# Altium PCB NRF52832_MODULE_V1.0_D.PcbDoc
Units mil, origin at the board's own origin, x right, y up, seen from the top; angles counter-clockwise.
Board outline 1129.92 x 688.98 mil, 2 copper layers (Top Layer, Bottom Layer); 74 components, 51 nets, 155 pads, 110 vias.
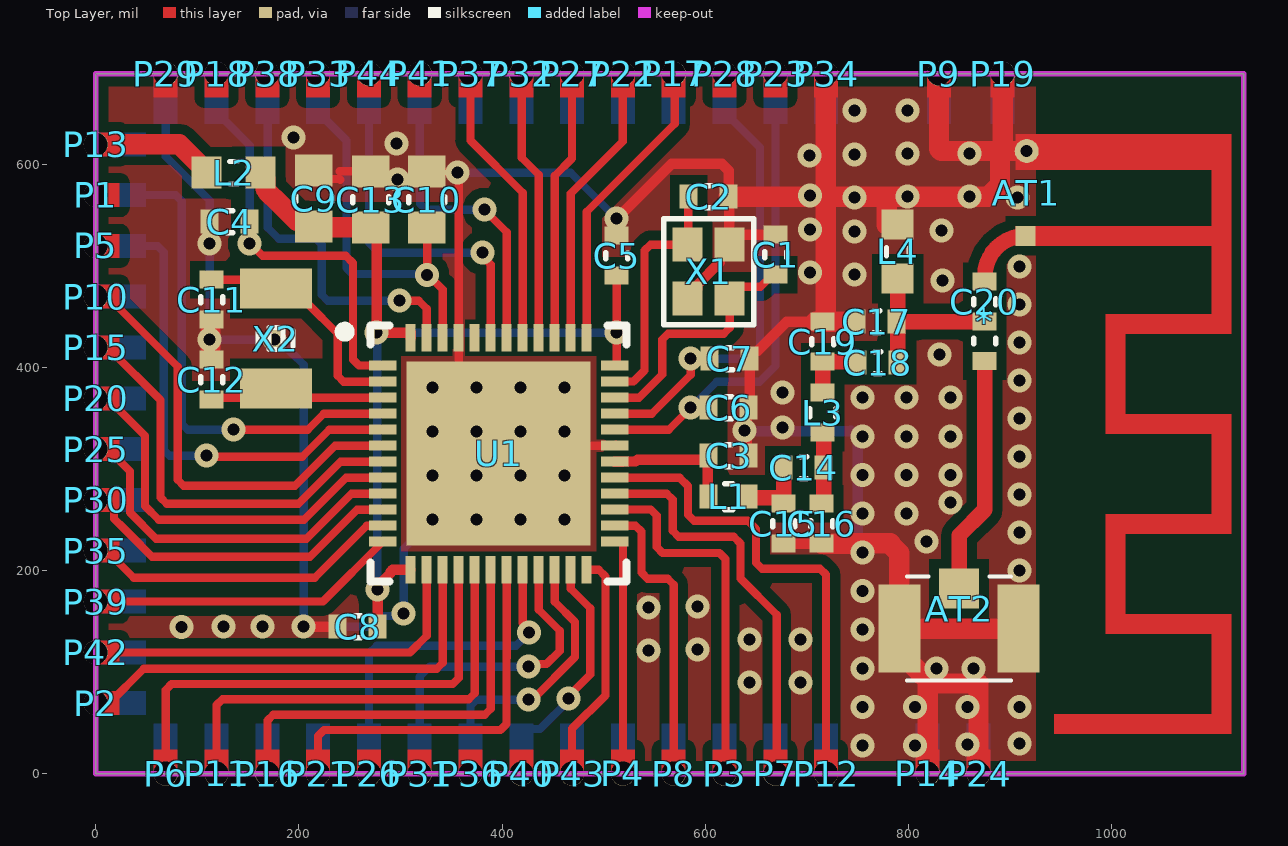
[diagram p0: Top Layer view]
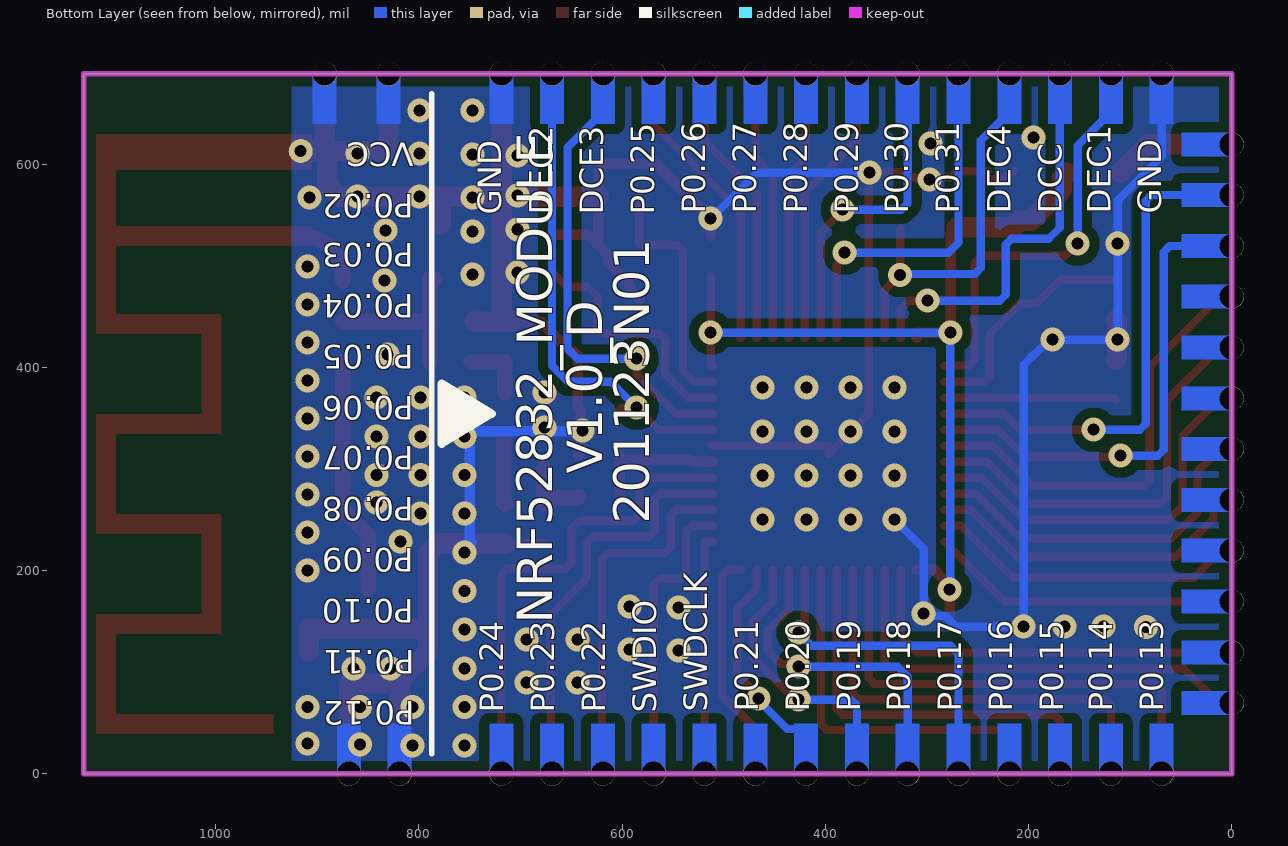
[diagram p1: Bottom Layer view, seen from below]

## Layer stack, top to bottom
Top Solder: solder mask 0.4, Solder Resist, Dk 3.5
Top Layer: signal copper 1.4
Dielectric 1: dielectric 12.6, FR-4, Dk 4.8
Bottom Layer: signal copper 1.4
Bottom Solder: solder mask 0.4, Solder Resist, Dk 3.5

## Board outline
0,0 0,688.98 1129.92,688.98 1129.92,0

## Design rules (kind name [scope] priority, off if disabled: settings)
Clearance NRF52832 [InComponent('U1')] p1: gap=5 ignorepadtopadclearanceinfootprint=FALSE
Clearance POLYGON [InPolygon] p2: gap=10 ignorepadtopadclearanceinfootprint=FALSE except(0: Arc-Hole Track-Hole SMDPad-Hole THPad-Hole Via-Hole Fill-Hole Poly-Hole Region-Hole Text-Hole)
Clearance [All] p3: gap=5 ignorepadtopadclearanceinfootprint=TRUE
HoleSize [All] p1: absolutevalues=TRUE maxlimit=31.5 minlimit=1 maxpercent=80.000 minpercent=20.000
MinimumSolderMaskSliver [All] p1: minsoldermaskwidth=0
PolygonConnect [All] p1: connectstyle=Direct reliefconductorwidth=10 reliefentries=4 polygonreliefangle="90 Angle" airgapwidth=10
RoutingVias [All] p1: holewidth=11.81 width=23.62 viastyle="Through Hole" minholewidth=11.81 minwidth=23.62 maxholewidth=28 maxwidth=50
SilkToSilkClearance [All] p1: silktosilkclearance=0
SolderMaskExpansion [All] p1: expansion=4 istentingtop=FALSE
Width RF [InNetClass('RF')] p1: maxlimit=15.29 minlimit=10 preferedwidth=15.29 impedanceprofiledriven=TRUE impedanceprofileid={D4BE34BD-DFD2-49A3-B558-EFD00441999C} impedanceprofilevalue=50.000000 minimp=50.000000 maximp=50.000000 favimp=50.000000
Width [All] p2: maxlimit=20 minlimit=5 preferedwidth=8
27 further rules are at their usual default settings.

## Classes and differential pairs
net class RF: Net*_1 Net*_2 Net*_3 NetC3_2 NetC14_1 NetC14_2 NetC18_1

## Components (designator, comment, footprint, x,y, rotation, side; value= is the part's Value field where it differs from the comment)
* "SELECT_0402" "PAD 0402_SELECT" 875,444.88 r270 top
AT1 "ANTEN_PCB" ANTEN_PCB_15MM_L 914.96,529.47 r270 top
AT2 "IPX_KK23011-32-7H" IPEX_ANTENNA 849.72,162.4 r180 top
C1 "12pF_0402" "CAP 0402" 669.29,510.83 r270 top
C2 "12pF_0402" "CAP 0402" 603.35,567.91 r180 top
C3 "0.8pF_0402" "CAP 0402" 623.03,312.99 r180 top
C4 "100nF_0402" "CAP 0402" 131.89,543.31 r0 top
C5 "100nF_0402" "CAP 0402" 512.8,509.84 r270 top
C6 "100pF_0402" "CAP 0402" 623.03,360.24 r0 top
C7 "100pF_0402" "CAP 0402" 624.02,408.46 r0 top
C8 "100nF_0402" "CAP 0402" 257.87,144.68 r0 top
C9 "4.7uF_0603" "CAP 0603" 214.57,565.94 r270 top
C10 "1uF_0603" "CAP 0603" 325.79,564.96 r270 top
C11 "12pF_0603" "CAP 0402" 114.17,466.54 r270 top
C12 "12pF_0603" "CAP 0402" 114.17,387.8 r90 top
C13 "10uF_0603" "CAP 0603" 270.67,564.96 r270 top
C14 "0.8pF_0402" "CAP 0402" 696.85,301.18 r180 top
C15 "0.8pF_0402" "CAP 0402" 677.17,246.06 r90 top
C16 "0.8pF_0402" "CAP 0402" 714.57,246.06 r90 top
C17 "0.8pF_0402" "CAP 0402" 768.7,444.88 r0 top
C18 "0.8pF_0402" "CAP 0402" 769.68,404.53 r0 top
C19 "0.8pF_0402" "CAP 0402" 715.55,425.2 r270 top
C20 "0.8pF_0402" "CAP 0402" 875,464.57 r270 top
L1 "3.9nH_0402" "Inductor 0402" 623.03,272.64 r0 top
L2 "10uH_0603" "INDUCTOR 0603" 135.83,591.54 r0 top
L3 "3.9nH_0402" "Inductor 0402" 715.55,355.32 r90 top
L4 "100nH_0603_HL" "INDUCTOR 0603_HL" 789.37,513.78 r270 top
P1 "Half-hole 0.6mm" HALF-HOLE_0.6MM 0,569.49 r180 top
P2 "Half-hole 0.6mm" HALF-HOLE_0.6MM 0,69.49 r180 top
P3 "Half-hole 0.6mm" HALF-HOLE_0.6MM 618.9,0 r270 top
P4 "Half-hole 0.6mm" HALF-HOLE_0.6MM 518.9,0 r270 top
P5 "Half-hole 0.6mm" HALF-HOLE_0.6MM 0,519.49 r180 top
P6 "Half-hole 0.6mm" HALF-HOLE_0.6MM 68.9,0 r270 top
P7 "Half-hole 0.6mm" HALF-HOLE_0.6MM 668.9,0 r270 top
P8 "Half-hole 0.6mm" HALF-HOLE_0.6MM 568.9,0 r270 top
P9 "Half-hole 0.6mm" HALF-HOLE_0.6MM 829.92,688.98 r90 top
P10 "Half-hole 0.6mm" HALF-HOLE_0.6MM 0,469.49 r180 top
P11 "Half-hole 0.6mm" HALF-HOLE_0.6MM 118.9,0 r270 top
P12 "Half-hole 0.6mm" HALF-HOLE_0.6MM 718.9,0 r270 top
P13 "Half-hole 0.6mm" HALF-HOLE_0.6MM 0,619.49 r180 top
P14 "Half-hole 0.6mm" HALF-HOLE_0.6MM 818.9,0 r270 top
P15 "Half-hole 0.6mm" HALF-HOLE_0.6MM 0,419.49 r180 top
P16 "Half-hole 0.6mm" HALF-HOLE_0.6MM 168.9,0 r270 top
P17 "Half-hole 0.6mm" HALF-HOLE_0.6MM 568.9,688.98 r90 top
P18 "Half-hole 0.6mm" HALF-HOLE_0.6MM 118.9,688.98 r90 top
P19 "Half-hole 0.6mm" HALF-HOLE_0.6MM 892.72,688.98 r90 top
P20 "Half-hole 0.6mm" HALF-HOLE_0.6MM 0,369.49 r180 top
P21 "Half-hole 0.6mm" HALF-HOLE_0.6MM 218.9,0 r270 top
P22 "Half-hole 0.6mm" HALF-HOLE_0.6MM 518.9,688.98 r90 top
P23 "Half-hole 0.6mm" HALF-HOLE_0.6MM 668.9,688.98 r90 top
P24 "Half-hole 0.6mm" HALF-HOLE_0.6MM 868.9,0 r270 top
P25 "Half-hole 0.6mm" HALF-HOLE_0.6MM 0,319.49 r180 top
P26 "Half-hole 0.6mm" HALF-HOLE_0.6MM 268.9,0 r270 top
P27 "Half-hole 0.6mm" HALF-HOLE_0.6MM 468.9,688.98 r90 top
P28 "Half-hole 0.6mm" HALF-HOLE_0.6MM 618.9,688.98 r90 top
P29 "Half-hole 0.6mm" HALF-HOLE_0.6MM 68.9,688.98 r90 top
P30 "Half-hole 0.6mm" HALF-HOLE_0.6MM 0,269.49 r180 top
P31 "Half-hole 0.6mm" HALF-HOLE_0.6MM 318.9,0 r270 top
P32 "Half-hole 0.6mm" HALF-HOLE_0.6MM 418.9,688.98 r90 top
P33 "Half-hole 0.6mm" HALF-HOLE_0.6MM 218.9,688.98 r90 top
P34 "Half-hole 0.6mm" HALF-HOLE_0.6MM 718.9,688.98 r90 top
P35 "Half-hole 0.6mm" HALF-HOLE_0.6MM 0,219.49 r180 top
P36 "Half-hole 0.6mm" HALF-HOLE_0.6MM 368.9,0 r270 top
P37 "Half-hole 0.6mm" HALF-HOLE_0.6MM 368.9,688.98 r90 top
P38 "Half-hole 0.6mm" HALF-HOLE_0.6MM 168.9,688.98 r90 top
P39 "Half-hole 0.6mm" HALF-HOLE_0.6MM 0,169.49 r180 top
P40 "Half-hole 0.6mm" HALF-HOLE_0.6MM 418.9,0 r270 top
P41 "Half-hole 0.6mm" HALF-HOLE_0.6MM 318.9,688.98 r90 top
P42 "Half-hole 0.6mm" HALF-HOLE_0.6MM 0,119.49 r180 top
P43 "Half-hole 0.6mm" HALF-HOLE_0.6MM 468.9,0 r270 top
P44 "Half-hole 0.6mm" HALF-HOLE_0.6MM 268.9,688.98 r90 top
U1 "NRF52832_QFAA_6X6" QFN48_6X6 396.65,314.96 r0 top
X1 "32Mhz_2016" CYSTAL-SMD-2016 603.35,494.09 r90 top value=4Mhz
X2 "32.768kHz_3215" CYSTAL-SMD-3215 177.36,428.35 r270 top value=4Mhz

## Footprints (in the part's own frame and the unit in brackets; to place one, negate y for a bottom-side part, rotate by r counter-clockwise, add the part's x,y. Pads: shape width x height; smd on the part's side, far side on the other; paste and mask are expansions set on the pad)
ANTEN_PCB_15MM_L [mm]
  rect 0.5x0.5 smd paste+0 mask+0.102: 1(0,0)
  round 0.6 hole 0.3 paste-2539.97 mask+0.102: 2(-2.117,0.035)
  Top Layer region: 12.452,5.152 11.952,5.152 11.952,0.712 12.452,0.712
  Top Layer region: 12.452,4.652 12.452,5.152 9.452,5.152 9.452,4.652
  Top Layer region: 9.455,2.013 9.955,2.013 9.955,5.152 9.455,5.152
  Top Layer region: 9.95,2.01 9.95,2.51 6.95,2.51 6.95,2.01
  Top Layer region: 7.45,5.15 6.95,5.15 6.95,2.01 7.45,2.01
  Top Layer region: 7.452,4.65 7.452,5.15 4.452,5.15 4.452,4.65
  Top Layer region: 4.452,2.01 4.952,2.01 4.952,5.15 4.452,5.15
  Top Layer region: 4.952,2.01 4.952,2.51 1.952,2.51 1.952,2.01
  Top Layer region: 1.952,2.01 2.452,2.01 2.452,5.15 1.952,5.15
  Top Layer region: -2.548,4.65 2.452,4.65 2.452,5.15 -2.548,5.15
  Top Layer region: -2.547,-0.25 -1.647,-0.25 -1.647,5.15 -2.547,5.15
  Top Layer region: -0.248,-0.25 0.252,-0.25 0.252,5.15 -0.248,5.15
"CAP 0402" [mm] "Chip Capacitor, 2-Leads, Body 1.00x0.50mm, IPC Medium Density"
  rect 0.45x0.6 smd: 1(-0.5,0) 2(0.5,0)
  silkscreen extent -0.08,-0.28 0.08,0.28, body extent -0.53,-0.28 0.53,0.28, height 0.55
"CAP 0603" [mm] "Chip Capacitor, 2-Leads, Body 1.60x0.80mm, IPC Medium Density"
  rect 0.8x0.94 smd: 1(-0.7,0) 2(0.7,0)
  silkscreen extent -0.08,-0.45 0.08,0.45, body extent -0.85,-0.45 0.85,0.45, height 0.9
CYSTAL-SMD-2016 [mm]
  rect 0.85x0.75 smd: 1(0.675,0.525) 2(-0.675,0.525) 3(-0.675,-0.525) 4(0.675,-0.525)
  silkscreen extent -1.33,-1.12 1.33,1.12, body extent -1,-0.8 1,0.8, height 0.8
CYSTAL-SMD-3215 [mm]
  rect 1x1.8 smd: 1(-1.25,0) 2(1.25,0)
  silkscreen extent -0.28,-0.45 0.28,0.43, body extent -1.6,-0.75 1.6,0.75, height 0.8
HALF-HOLE_0.6MM [mm]
  round 0.6 hole 0.6: 1(0,0)
  Top Layer region: -0.6,-0.3 0,-0.3 0,0.3 -0.6,0.3
  Bottom Layer region: -1.26,-0.3 0,-0.3 0,0.3 -1.26,0.3
  Keep-Out Layer lines w0.025: 0,0.381 0,-0.381
"Inductor 0402" [mm] "Chip Inductor, 2-Leads, Body 1.12x0.66mm, IPC Medium Density"
  rect 0.45x0.6 smd: 1(-0.5,0) 2(0.5,0)
  silkscreen extent -0.1,-0.33 0.1,0.33, body extent -0.51,-0.25 0.5,0.26, height 0.52
"INDUCTOR 0603" [mm]
  rect 0.75x0.8 smd: 1(-0.675,0) 2(0.675,0)
  silkscreen extent -0.1,-0.28 0.1,0.28, body extent -0.79,-0.39 0.81,0.41, height 0.81
"INDUCTOR 0603_HL" [mm]
  rect 0.75x0.8 smd: 1(-0.675,0) 2(0.675,0)
  silkscreen extent -0.1,-0.28 0.1,0.28, body extent -0.93,-0.49 0.82,0.51, height 1.01
IPEX_ANTENNA [mm]
  rect 1x1 smd: 1(0,-0.5)
  rect 1.05x2.2 smd: 2(-1.492,0.5) 2(1.492,0.5)
  silkscreen extent -1.3,-0.8 1.3,1.8, body extent -1.46,-1.02 1.54,1.83, height 1.34
"PAD 0402_SELECT" [mm] "Chip Capacitor, 2-Leads, Body 1.00x0.50mm, IPC Medium Density"
  rect 0.45x0.6 smd: 1(-1.008,0) 2(-0.008,0) 3(0.983,0)
  silkscreen extent -0.58,-0.28 0.56,0.28
QFN48_6X6 [mm] "QFN, 48-Leads, Body 6.00x6.00mm, Pitch 0.40mm, Thermal Pad 4.66x4.66mm, IPC Medium Density"
  rect 0.68x0.25 smd: 1(-2.9,2.2) 2(-2.9,1.8) 3(-2.9,1.4) 4(-2.9,1) 5(-2.9,0.6) 6(-2.9,0.2) 7(-2.9,-0.2) 8(-2.9,-0.6) 9(-2.9,-1) 10(-2.9,-1.4) 11(-2.9,-1.8) 12(-2.9,-2.2) 25(2.9,-2.2) 26(2.9,-1.8) 27(2.9,-1.4) 28(2.9,-1) 29(2.9,-0.6) 30(2.9,-0.2) 31(2.9,0.2) 32(2.9,0.6) 33(2.9,1) 34(2.9,1.4) 35(2.9,1.8) 36(2.9,2.2)
  rect 0.25x0.68 smd: 13(-2.2,-2.9) 14(-1.8,-2.9) 15(-1.4,-2.9) 16(-1,-2.9) 17(-0.6,-2.9) 18(-0.2,-2.9) 19(0.2,-2.9) 20(0.6,-2.9) 21(1,-2.9) 22(1.4,-2.9) 23(1.8,-2.9) 24(2.2,-2.9) 37(2.2,2.9) 38(1.8,2.9) 39(1.4,2.9) 40(1,2.9) 41(0.6,2.9) 42(0.2,2.9) 43(-0.2,2.9) 44(-0.6,2.9) 45(-1,2.9) 46(-1.4,2.9) 47(-1.8,2.9) 48(-2.2,2.9)
  rect 4.6x4.6 smd: 49(0,0)
  silkscreen extent -3.97,-3.2 3.2,3.2, body extent -3.05,-3.05 3.05,3.05, height 0.9

## Part data
AT1: "ANTEN_PCB_15MM"
AT2: library part ANTEN_IPX, "ANTEN IPX KK23011-32-7H FOXCONN"
C4 C5 C8: library part 104_100nF_0402, "104_100nF_0402"
C6 C7: library part 101_100pF_0402, "101_100pF_0402"
C10: library part 105_1uF_0603, "1uF_0603 16V"
C11 C12: library part 12pF_0402, "12pF_0402"
C13: library part 106_10uF_0603, "10uF_0603 16V"
L1 L3: library part 3.9nH
L4: "SDWL1608CR10JSTF Wire Wound Chip Ceramic Inductor"
P1 P2 P3 P4 P5 P6 P7 P8 P9 P10 P11 P12 P13 P14 P15 P16 P17 P18 P19 P20 P21 P22 P23 P24 P25 P26 P27 P28 P29 P30 P31 P32 P33 P34 P35 P36 P37 P38 P39 P40 P41 P42 P43 P44: "Part Half-hole 0.6mm"
U1: library part NRF52832
X1: library part "Crystal 2016 32MHz"
X2: library part "Crystal 3215 32.768kHz", "Crystal 3215 32.768kHz"

## Via types
v1: diameter 23.62, hole 11.81, Top Layer to Bottom Layer, tented both sides, 94 vias
v2: diameter 23.62, hole 11.81, Top Layer to Bottom Layer, 16 vias

## Nets (pads, with @x,y where several pads share a name; then routed paths per layer and width w, separated by ;. In a path a pad name is that pad's centre, name@x,y a point inside that pad or via, vN(x,y) a via of type N, cw(c..) or ccw(c..) an arc to the next point about the centre after c; other vN are vias at no path point)
DCC: P38.1 U1.47 | length 379.8
  Top Layer w8: v1(299.21,465.55) 317.91,465.55 325.79,457.68 U1.47
  Bottom Layer w8: 169.29,670.28 169.29,537.4 180.12,526.57 216.58,526.57 222.44,520.72 222.44,471.41 228.3,465.55 v1(299.21,465.55)
DEC1: C4.2 P18.1 U1.1 | length 414.2
  Top Layer w8: C4.2 v1(151.57,521.65) 152.43,521.65 164.24,509.84 246.11,509.84 253.19,502.76 253.19,407.51 259.05,401.65 282.4,401.65 U1.1
  Bottom Layer w8: 118.9,664.17 118.9,651.18 125.71,644.37 151.57,618.5 v1(151.57,521.65)
DEC2: C6.1 P23.1 U1.32 | length 468.6
  Top Layer w8: U1.32 563.98,338.58 v1@586.63,361.23 ; v1(585.63,360.24) 600.47,360.24 604.33,356.38 C6.1@604.33,356.3
  Bottom Layer w8: v1(585.63,360.24) 611.22,385.83 653.2,385.83 668.9,401.53 668.9,664.17
DEC3: C7.1 P28.1 U1.33 | length 482.6
  Top Layer w8: U1.33 547.24,354.33 585.63,392.72 v1(585.63,408.46) C7.1
  Bottom Layer w8: v1(585.63,408.46) 643.94,408.46 653.9,418.42 653.9,616.18 625.71,644.37 618.9,651.18 618.9,664.17 P28.1
DEC4: C10.2 P33.1 U1.46 | length 375.9
  Top Layer w8: C10.2 326.29,536.89 v1(326.29,490.98) ; v1@326.29,491.96 341.54,476.72 U1.46
  Bottom Layer w8: 218.9,664.17 218.9,651.18 225.71,644.37 247,623.08 247,497.82 252.86,491.96 325.32,491.96 v1(326.29,490.98)
GND: AT1.2 AT2.2 C1.1 C2.1 C3.1 C4.1 C5.1 C6.2 C7.2 C8.1 C9.1 C10.1 C11.2 C12.2 C13.1 C15.1 C16.1 C17.1 C19.1 L4.1 P9.1 P14.1 P19.1 P24.1 P29.1 P34.1 U1.31 U1.45 U1.49 X1.2 X1.4 | length 3885
  Top Layer w8: C9.1 220.31,587.76 223.07,587.76 225.49,585.34 240.02,585.34 240.71,584.65 ; 240.16,593.01 270.67,593.01 276.91,586.77 285.85,586.77 287.28,585.34 296.55,585.34 v1(297.24,584.65) 297.94,585.34 309.17,585.34 310.61,586.77 320.04,586.77 C10.1 326.28,592.03 355.81,592.03 v1(356.3,591.54) 357.28,590.55 U1.45 357.28,354.33 v2(375,336.61) U1.49 396.65,322.83 U1.31 U1.31@511.81,323.82
  Top Layer w10: v1(112.2,521.65) C4.1@112.2,537.4 ; v1(204.72,144.68) C8.1 ; C5.1 v1(512.8,546.26) 566.93,600.39 616.14,600.39 623.03,593.5 C2.1 623.52,567.42 623.52,521.16 X1.4 ; X1.2 592.44,477.28 592.44,481.58 614.25,503.39 614.25,510.91 X1.4 ; C3.1@643.7,312.99 640.75,315.94 640.75,335.63 v1(638.78,337.6) 640.75,339.57 640.75,358.27 643.7,361.22 C7.2 643.7,411.42 647.56,415.28 650.51,415.28 680.12,444.88 C19.1@708.66,444.88 ; C1.1 633.78,530.51 X1.4 X1.4 ; C15.1 C16.1
  Top Layer w20: C12.2 114.04,407.48 112.9,408.62 112.9,426.47 v1(112.2,427.17) 112.9,427.86 112.9,445.71 114.04,446.85 C11.2 ; C2.1 718.5,567.91 ; C19.1@708.66,444.88 C19.1@718.5,444.88 ; C16.1 747.05,226.38 747.54,226.87 781.99,226.87 782.48,226.38 782.48,225.4 790.98,216.89 AT2.2@790.98,142.72 ; 718.5,666.56 718.5,567.91 ; C17.1@745.08,444.88 C19.1@718.5,444.88 ; L4.1@778.54,540.35 778.54,567.91 ; P14.1 818.9,88.78 ; P9.1 829.92,615.16 832.24,612.84 890.12,612.84 ; P24.1 868.9,88.78 818.9,88.78 ; P19.1 892.72,612.84 ; AT2.2@908.46,120.08 908.46,142.72 AT2.2@790.98,142.72 ; AT1.2 892.72,612.84 ; C19.1@718.5,444.88 718.5,567.91 ; 718.5,567.91 778.54,567.91 ; 778.54,567.91 878.4,567.91 890.12,579.63 890.12,612.84 ; AT2.2@790.98,142.72 790.98,120.08 818.9,92.17 818.9,88.78 ; 890.12,612.84 892.72,612.84
  Bottom Layer w8: P29.1 68.9,607.66 112.2,564.36 v1(112.2,427.17) 179.87,427.17 193.32,413.71 193.57,413.71 204.72,402.56 v1(204.72,144.68) 271.37,144.68 281.86,155.18 300.57,155.18 v1(303.18,157.79) ; v1@299.21,157.48 303.18,161.45 303.18,221.49 v2(331.69,250) ; v1(356.3,591.54) 467.52,591.54 v1(512.8,546.26)
  Bottom Layer w10: v1(638.78,337.6) 639.27,337.11 742.67,337.11 743.16,337.6 750,330.76 750,229.33 v1@748.03,227.36
  other v1: 754.92,27.56 806.43,27.56 857.94,28.54 909.45,29.53 754.92,65.62 806.43,65.62 857.94,65.62 909.45,65.62 643.7,89.57 693.9,89.57 754.92,103.67 827.76,103.67 864.17,103.67 544.29,121.06 592.52,122.05 643.7,131.89 693.9,131.89 754.92,141.73 84.6,144.45 125.98,144.68 164.37,144.68 544.29,163.39 592.52,164.37 754.92,179.79 909.45,199.8 754.92,217.85 817.91,228.35 909.45,237.2 754.92,255.91 798.23,255.91 841.54,266.73 909.45,274.61 754.92,293.96 798.23,293.96 841.54,293.96 909.45,312.01 754.92,332.02 798.23,332.02 841.54,332.02 676.18,340.55 909.45,349.41 754.92,370.08 798.23,370.08 841.54,370.08 676.18,375 909.45,386.81 830.71,412.4 909.45,424.21 176.18,427.17 909.45,461.61 833.66,485.24 747.05,491.14 702.84,493.41 909.45,499.02 747.05,533.46 832.68,534.45 702.84,535.73 747.05,566.93 907.48,566.93 799.21,567.91 860.24,567.91 702.84,569.2 702.76,608.27 747.05,609.25 799.21,610.24 860.24,610.24 296.26,620.08 194.88,625.98 747.05,652.56 799.21,652.56
  other v2: 375,250 418.31,250 461.61,250 331.69,293.31 375,293.31 418.31,293.31 461.61,293.31 331.69,336.61 418.31,336.61 461.61,336.61 331.69,379.92 375,379.92 418.31,379.92 461.61,379.92
Net*_1: *.1 AT1.1 C20.1 | length 67.7
  Top Layer w15.29: *.1 875,489.51 cw(c914.96,489.51) AT1.1
Net*_2: *.2 C17.2 C18.2 C20.2 L4.2 | length 172.2
  Top Layer w15.29: L4.2@784.45,487.2 L4.2 C17.2@789.37,445.87 ; C17.2 *.2@874.68,444.88 ; C18.2 C17.2@789.37,443.9 ; C20.2 *.2
Net*_3: *.3 AT2.1 | length 234.6
  Top Layer w15.29: AT2.1 849.72,234.57 875,259.84 *.3
NetC3_2: C3.2 L1.1 U1.30 | length 135
  Top Layer w10: U1.30 519.13,307.09 519.21,307.17 531.34,307.17 533.16,308.98 602.13,308.98 603.35,310.2 C3.2 ; L1.1@602.36,274.61 C3.2@602.36,312.99
NetC14_1: C14.1 C16.2 L3.1 | length 70.2
  Top Layer w15.29: C16.2 715.32,265.75 716.54,266.96 L3.1@716.54,334.65
NetC14_2: C14.2 C15.2 L1.2 | length 72.7
  Top Layer w15.29: L1.2 643.91,271.44 668.52,271.44 674.21,265.75 C15.2 C14.2
NetC18_1: C18.1 C19.2 L3.2 | length 64
  Top Layer w15.29: L3.2 C19.2 C18.1@749.02,405.51
P0.00: C11.1 U1.2 X2.1 | length 234.1
  Top Layer w8: C11.1 168.7,486.22 192.05,462.87 208.39,462.87 238.19,433.07 238.19,391.68 244.05,385.83 U1.2
P0.01: C12.1 U1.3 X2.2 | length 169.1
  Top Layer w8: C12.1 116.06,370 282.4,370 U1.3
P0.02: P1.1 U1.4 | length 496.7
  Top Layer w8: v1(135.83,338.58) 208.66,338.58 224.41,354.33 U1.4
  Bottom Layer w8: 16.34,569.49 78.79,569.49 84.65,563.63 84.65,344.49 90.55,338.58 v1(135.83,338.58)
P0.03: P5.1 U1.5 | length 493.5
  Top Layer w8: v1(109.25,312.99) 110.24,312.01 203.3,312.01 229.87,338.58 U1.5
  Bottom Layer w8: P5.1 61.07,519.49 66.93,513.63 66.93,318.85 72.79,312.99 v1(109.25,312.99)
P0.04: P10.1 U1.6 | length 422.2
  Top Layer w8: 16.73,464.57 80.71,400.59 80.71,289.32 86.57,283.46 195.97,283.46 235.34,322.83 U1.6
P0.05: P15.1 U1.7 | length 405.5
  Top Layer w8: 13.78,418.31 13.78,417.52 63.62,367.68 63.62,272.01 69.88,265.75 199.47,265.75 240.81,307.09 U1.7
P0.06: P20.1 U1.8 | length 369.5
  Top Layer w8: 17.72,363.58 48.62,332.68 48.62,263.39 62.01,250 204.93,250 246.27,291.34 U1.8
P0.07: P25.1 U1.9 | length 340.9
  Top Layer w8: 17.72,313.58 33.62,297.68 33.62,257.17 59.5,231.3 207.44,231.3 251.74,275.59 U1.9
P0.08: P30.1 U1.10 | length 317.7
  Top Layer w8: 12.5,266.04 15.87,262.68 18.11,262.68 18.11,250.95 27.76,241.3 33.62,235.44 55.48,213.58 210.94,213.58 257.2,259.84 U1.10
P0.09: P35.1 U1.11 | length 298.1
  Top Layer w8: 13.78,212.6 17.72,212.6 37.4,192.91 215.55,192.91 266.73,244.09 U1.11
P0.10: P39.1 U1.12 | length 306.9
  Top Layer w8: P39.1 223.62,169.49 U1.12
P0.11: P42.1 U1.14 | length 397.5
  Top Layer w8: P42.1 309.45,119.49 325.79,135.83 U1.14
P0.12: P2.1 U1.15 | length 449.6
  Top Layer w8: P2.1 13.39,69.49 47.24,103.35 335.68,103.35 341.54,109.2 U1.15
P0.13: P6.1 U1.16 | length 482.3
  Top Layer w8: P6.1 68.9,82.49 74.76,88.35 351.43,88.35 357.28,94.2 U1.16
P0.14: P11.1 U1.17 | length 448.1
  Top Layer w8: P11.1 118.9,67.49 124.76,73.35 367.17,73.35 373.03,79.2 U1.17
P0.15: P16.1 U1.18 | length 413.8
  Top Layer w8: P16.1 168.9,52.21 174.76,58.07 382.92,58.07 388.78,63.93 U1.18
P0.16: P21.1 U1.19 | length 379.5
  Top Layer w8: P21.1 218.9,11.81 218.9,37.21 224.76,43.07 398.51,43.07 404.37,48.93 404.37,114.35 404.53,114.51 U1.19
P0.17: P26.1 U1.20 | length 348.7
  Top Layer w8: U1.20 420.28,148.53 426.34,142.47 v1(426.34,138.78)
  Bottom Layer w8: P26.1 268.9,118.31 276.57,125.98 413.54,125.98 v1(426.34,138.78)
P0.18: P31.1 U1.21 | length 332.2
  Top Layer w8: v1(426.18,105.32) 428.79,107.92 443.68,107.92 456.69,120.93 456.69,140.75 436.02,161.42 U1.21
  Bottom Layer w8: P31.1 318.9,95.47 328.74,105.32 v1(426.18,105.32)
P0.19: P36.1 U1.22 | length 283.9
  Top Layer w8: v1(426.18,72.83) 429.81,72.83 471.69,114.72 471.69,149.37 451.77,169.29 U1.22
  Bottom Layer w8: P36.1 368.9,66.98 374.76,72.83 v1(426.18,72.83)
P0.20: P40.1 U1.23 | length 243.7
  Top Layer w8: v1(465.55,73.82) 465.55,76.52 486.69,97.66 486.69,162.91 467.6,182.01 467.6,200.71 U1.23
  Bottom Layer w8: P40.1 418.9,37.28 425.71,44.09 437.43,44.09 465.55,72.21 v1(465.55,73.82)
P0.21: P43.1 U1.24 | length 215.4
  Top Layer w8: 469.49,13.78 468.9,14.37 468.9,44.35 501.69,77.15 501.69,194.22 495.13,200.79 U1.24
P0.22: P3.1 U1.27 | length 344.4
  Top Layer w8: U1.27 510.91,259.92 546.31,259.92 552.17,254.06 552.17,223.18 558.02,217.32 613.95,217.32 619.8,211.46 619.8,18.62 621.06,17.36 621.06,14.76
P0.23: P7.1 U1.28 | length 386.7
  Top Layer w8: U1.28 562.06,275.59 567.91,269.73 567.91,239.13 573.77,233.27 628,233.27 634.8,226.47 634.8,191.97 670.28,156.5 670.28,16.73
P0.24: P12.1 U1.29 | length 479.6
  Top Layer w8: U1.29 574.77,291.34 582.91,283.2 582.91,254.87 588.77,249.02 641.78,249.02 649.8,240.99 649.8,207.63 655.66,201.77 713.04,201.77 718.9,195.91 718.9,11.81 P12.1
P0.25: P17.1 U1.37 | length 275.1
  Top Layer w8: U1.37 483.27,553.15 569.88,639.76 569.88,668.31
P0.26: P22.1 U1.38 | length 264.3
  Top Layer w8: U1.38 467.52,571.1 518.7,622.28 518.7,672.24
P0.27: P27.1 U1.39 | length 255.2
  Top Layer w8: U1.39 451.77,588.58 468.9,605.71 468.9,673.62 471.46,676.18
P0.28: P32.1 U1.40 | length 254.2
  Top Layer w8: 416.34,675.2 419.31,672.23 419.31,606.28 436.02,589.57 U1.40
P0.29: P37.1 U1.41 | length 268.2
  Top Layer w8: 369,676 369,623.33 368.9,623.23 420.28,571.85 U1.41
P0.30: P41.1 U1.42 | length 304.5
  Top Layer w8: v1(382.87,555.12) 382.87,554.6 404.53,532.95 U1.42
  Bottom Layer w8: 318.9,664.17 318.9,593.84 319.06,593.68 319.06,560.98 324.91,555.12 v1(382.87,555.12)
P0.31: P44.1 U1.43 | length 344.6
  Top Layer w8: v1(380.91,512.8) 380.91,509.11 388.78,501.24 U1.43
  Bottom Layer w8: 268.9,664.17 268.9,522.59 278.69,512.8 v1(380.91,512.8)
SWDCLK: P4.1 U1.25 | length 236.4
  Top Layer w8: U1.25 518.82,228.35 518.9,228.27 P4.1
SWDIO: P8.1 U1.26 | length 291.7
  Top Layer w8: U1.26 531.31,244.09 537.17,238.24 537.17,198.02 543.26,191.93 562.99,191.93 568.9,186.02 P8.1
VCC: L2.1 P13.1 | length 121.4
  Top Layer w20: P13.1 82.28,619.49 109.25,592.52 L2.1
VDD_nRF: C5.2 C8.2 C9.2 C13.2 L2.2 U1.13 U1.36 U1.48 | length 941.9
  Top Layer w8: U1.36 512.72,401.57 512.8,401.65 v1(512.8,434.06) C5.2
  Top Layer w10: C13.2 276.57,531.5 v1(276.57,434.06) 309.96,434.06 310.04,433.98 U1.48 ; C8.2 277.56,184.79 290.12,197.35 290.12,198.83 291.99,200.71 U1.13@309.96,200.71
  Top Layer w20: L2.2 162.4,590.55 167.17,585.79 167.17,575.47 168.56,574.07 168.56,573.31 181.06,560.81 197.74,544.13 208.82,544.13 C9.2 215.06,537.89 270.18,537.89 C13.2
  Bottom Layer w8: v1(277.56,181.1) 277.07,181.59 277.07,433.56 v1(276.57,434.06) v1(512.8,434.06)
XC1: C1.2 U1.34 X1.3 | length 244.7
  Top Layer w8: U1.34 534.76,370.08 557.57,392.88 557.57,427.21 563.43,433.07 618.16,433.07 624.02,438.93 X1.3 ; X1.3@624.02,469.49 633.78,479.25 654.45,479.25 666.34,491.14 C1.2
XC2: C2.2 U1.35 X1.1 | length 244.5
  Top Layer w8: U1.35 510.91,385.91 529.38,385.91 540.24,396.77 540.24,514.81 546.1,520.67 X1.1 583.17,521.16 583.17,567.42 C2.2
pads on no net: U1.44

## Polygon pours and split planes (outlines as drawn)
GND on Bottom Layer "GND_L02_P000" (solid, remove dead copper, pour order 0): 0,0 0,688.98 925.2,688.98 925.2,0
no net on Bottom Overlay "NONET_L-01_P-001" (none): 728.35,354.33 777.56,324.8 777.56,383.86
GND on Top Layer "GND_L01_P001" (solid, remove dead copper, pour order 1): 0,0 0,688.98 925.2,688.98 925.2,0

## Keep-outs
Keep-Out Layer:
  the board outline again, w5

## Silkscreen, mask and mechanical layers (free items; w line width, h text height)
Bottom Overlay:
  region: 728.35,354.33 777.56,324.8 777.56,383.86
  lines w5: 787.4,19.68 787.4,669.29 ; 728.35,354.33 777.56,324.8 777.56,383.86 728.35,354.33
  text "VCC" at 805.12,628.83 h40 r180
  text "P0.02" at 805.12,578.44 h40 r180
  text "GND" at 61.32,551.18 h40 r270
  text "DEC1" at 111.33,551.18 h40 r270
  text "DCC" at 159.56,551.18 h40 r270
  text "DEC4" at 209.76,551.18 h40 r270
  text "P0.31" at 260.14,551.18 h40 r270
  text "P0.30" at 310.34,551.18 h40 r270
  text "P0.29" at 359.55,551.18 h40 r270
  text "P0.28" at 409.74,551.18 h40 r270
  text "P0.27" at 459.94,551.18 h40 r270
  text "P0.26" at 510.14,551.18 h40 r270
  text "P0.25" at 560.34,550.2 h40 r270
  text "DCE3" at 610.53,550.2 h40 r270
  text "DEC2" at 660.54,550.2 h40 r270
  text "GND" at 710.93,550.2 h40 r270
  text "P0.03" at 805.12,530.22 h40 r180
  text "P0.04" at 805.12,480.02 h40 r180
  text "P0.05" at 805.12,429.82 h40 r180
  text "P0.06" at 805.12,379.63 h40 r180
  text "P0.07" at 805.12,330.41 h40 r180
  text "V1.0_D" at 607.78,295.28 h60 r270
  text "P0.08" at 805.12,280.22 h40 r180
  text "201123N01" at 561.47,246.06 h60 r270
  text "P0.09" at 805.12,230.02 h40 r180
  text "P0.10" at 805.12,179.82 h40 r180
  text "NRF52832_MODULE" at 656.99,147.64 h60 r270
  text "P0.11" at 804.13,129.63 h40 r180
  text "P0.12" at 804.13,79.43 h40 r180
  text "P0.13" at 59.35,61.02 h40 r270
  text "P0.14" at 109.55,61.02 h40 r270
  text "P0.15" at 157.78,61.02 h40 r270
  text "P0.16" at 207.97,61.02 h40 r270
  text "P0.17" at 258.17,61.02 h40 r270
  text "P0.18" at 308.37,61.02 h40 r270
  text "P0.19" at 357.58,61.02 h40 r270
  text "P0.20" at 407.78,61.02 h40 r270
  text "P0.21" at 457.97,61.02 h40 r270
  text "SWDCLK" at 508.17,61.02 h40 r270
  text "SWDIO" at 558.37,60.04 h40 r270
  text "P0.22" at 608.56,60.04 h40 r270
  text "P0.23" at 658.76,60.04 h40 r270
  text "P0.24" at 708.96,60.04 h40 r270